# Altium PCB Modem.PcbDoc
Units mm, origin at the board's own origin, x right, y up, seen from the top; angles counter-clockwise.
Board outline 131.95 x 85.6 mm, 2 copper layers (Top Layer, Bottom Layer); 20 components, 17 nets, 99 pads, 0 vias.
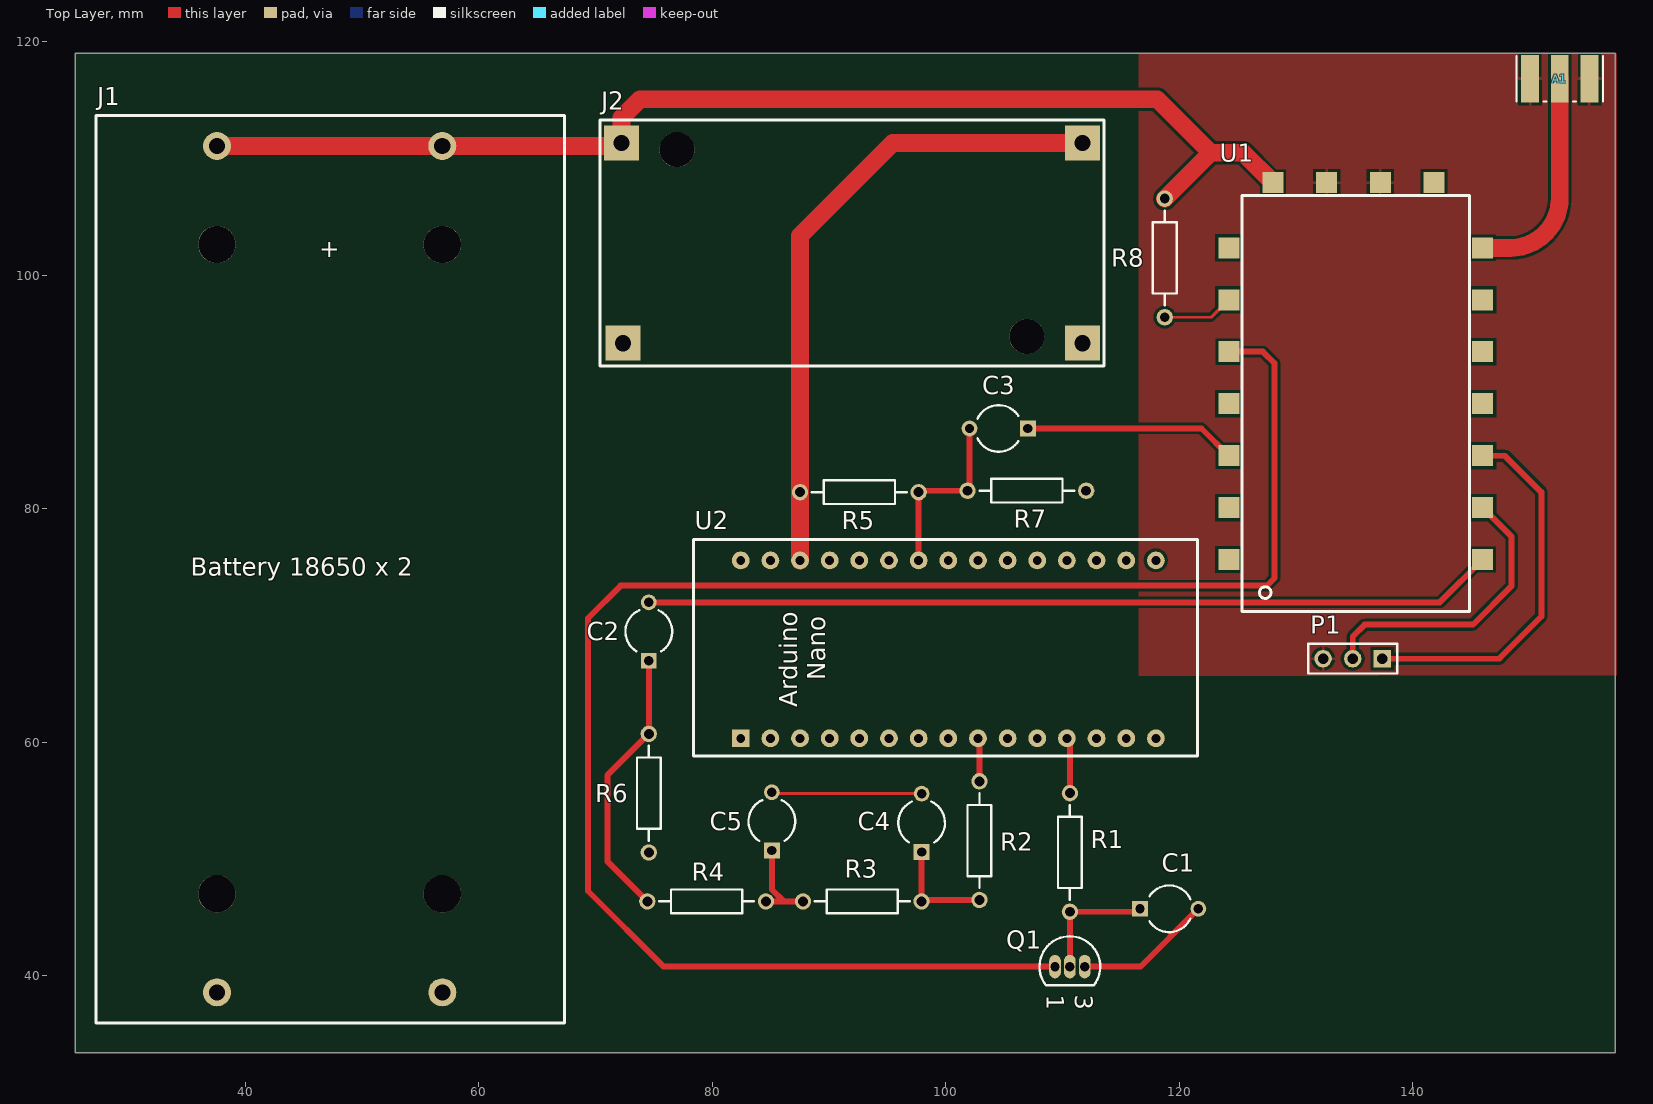
[diagram p0: Top Layer view]
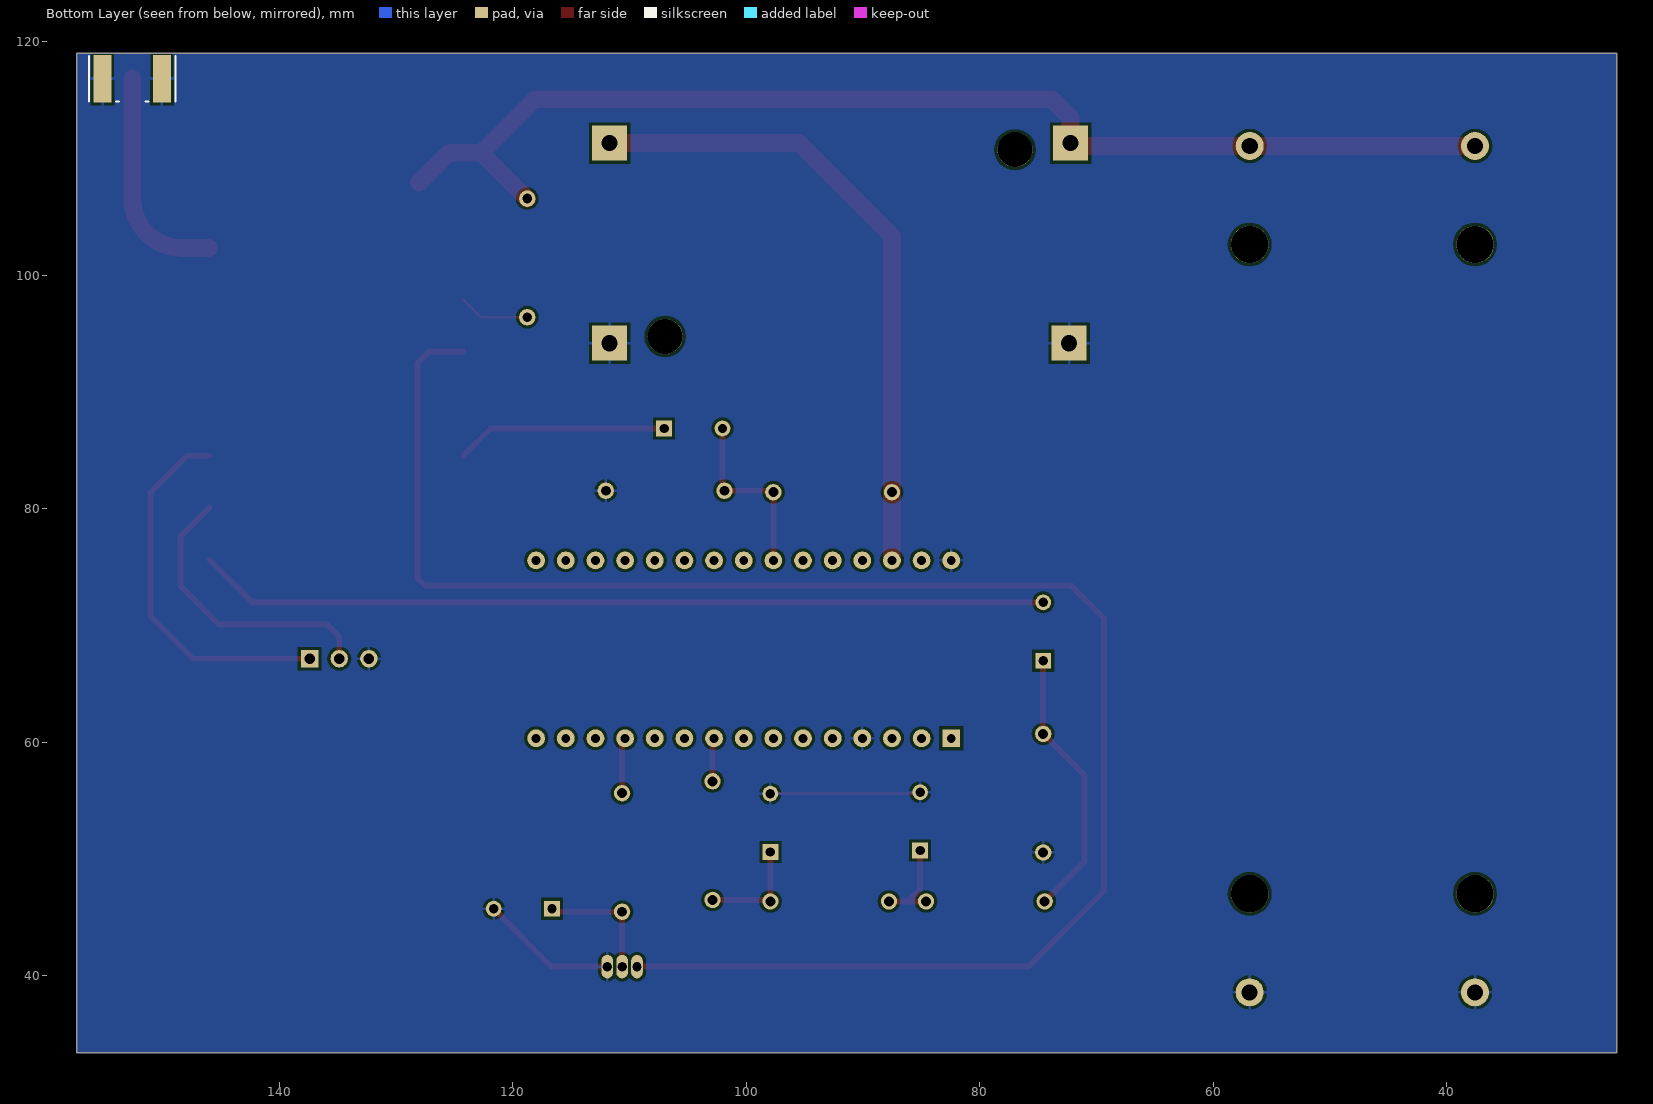
[diagram p1: Bottom Layer view, seen from below]

## Layer stack, top to bottom
Top Solder: solder mask 0.0102, Solder Resist, Dk 3.5
Top Layer: signal copper 0.0356
Dielectric 1: dielectric 0.32, FR-4, Dk 4.8
Bottom Layer: signal copper 0.0356
Bottom Solder: solder mask 0.0102, Solder Resist, Dk 3.5

## Board outline
25.4,33.401 157.353,33.401 157.353,72.517 157.353,118.999 25.4,118.999

## Design rules (kind name [scope] priority, off if disabled: settings)
Clearance [All] p1: gap=0.254
PolygonConnect [All] p1: connectstyle=Relief reliefconductorwidth=0.254 reliefentries=4 polygonreliefangle="90 Angle" airgapwidth=0.254
RoutingVias [All] p1: holewidth=0.711 width=1.27 viastyle="Through Hole" minholewidth=0.711 minwidth=1.27 maxholewidth=0.711 maxwidth=1.27
SolderMaskExpansion [All] p1: expansion=0.102
Width [All] p1: maxlimit=1.524 minlimit=0.254 preferedwidth=0.762
30 further rules are at their usual default settings.

## Components (designator, comment, footprint, x,y, rotation, side; value= is the part's Value field where it differs from the comment)
A1 "Basic Antenna" CON-SMA-EDGE062 152.578,116.84 r90 top
C1 "Cap2" CAPR5-4X5 119.126,45.72 r0 top
C2 "Cap2" CAPR5-4X5 74.549,69.469 r90 top
C3 "Cap2" CAPR5-4X5 104.521,86.868 r180 top
C4 "Cap2" CAPR5-4X5 97.917,53.086 r90 top
C5 "Cap2" CAPR5-4X5 85.09,53.213 r90 top
J1 "BatteryHolder18650" BatteryHolder18650 67.31,113.665 r270 top
J2 "CN6009" CN6009 70.358,113.284 r0 top
P1 "Header 3" HDR1X3 137.389,67.142 r180 top
Q1 "P2N2222A" 29-04 110.617,40.767 r270 top
R1 "Res2" AXIAL-0.4 110.617,50.546 r270 top
R2 "Res2" AXIAL-0.4 102.87,51.562 r270 top
R3 "Res2" AXIAL-0.4 92.837,46.355 r180 top
R4 "Res2" AXIAL-0.4 79.502,46.355 r180 top
R5 "Res2" AXIAL-0.4 92.583,81.407 r180 top
R6 "Res2" AXIAL-0.4 74.549,55.626 r90 top
R7 "Res2" AXIAL-0.4 106.934,81.534 r180 top
R8 "Res2" AXIAL-0.4 118.745,101.473 r270 top
U1 "SA818" SA818 125.349,106.807 r0 top
U2 "arduinoNano" "Arduino nano" 78.359,58.801 r0 top

## Footprints (in the part's own frame and the unit in brackets; to place one, negate y for a bottom-side part, rotate by r counter-clockwise, add the part's x,y. Pads: shape width x height; smd on the part's side, far side on the other; paste and mask are expansions set on the pad)
29-04 [mm] "TO, Flat Index; 3 In-Line, Axial Leads; Body Dia. 4.8mm; Leads 0.48 x 0.5 mm (max)"
  oval 2x1 hole 0.8: 1(0,-1.27) 2(0,0) 3(0,1.27)
  silkscreen extent -2.6,-2.6 1.6,2.6
"Arduino nano" [mil] "arduino nano"
  rect 60x60 hole 30: 1(160,60)
  round 60 hole 30: 2(260,60) 3(360,60) 4(460,60) 5(560,60) 6(660,60) 7(760,60) 8(860,60) 9(960,60) 10(1060,60) 11(1160,60) 12(1260,60) 13(1360,60) 14(1460,60) 15(1560,60) 16(1460,660) 17(1360,660) 18(1260,660) 19(1160,660) 20(1060,660) 21(960,660) 22(860,660) 23(760,660) 24(660,660) 25(560,660) 26(460,660) 27(360,660) 28(260,660) 29(160,660) 30(1560,660)
  silkscreen extent 0,0 1700,730
AXIAL-0.4 [mm] "Axial Device, Thru-Hole; 2 Leads; 0.4 in Pin Spacing"
  round 1.4 hole 0.85: 1(-5.08,0) 2(5.08,0)
  silkscreen extent -4.06,-1.02 4.06,1.02
BatteryHolder18650 [mm]
  round 2.4 hole 1.38: 1(2.6,-10.455) 2(75.1,-10.45) 3(2.6,-29.755) 4(75.1,-29.755)
  round 3.2 hole 3.2 unplated mask+1: ""(11.04,-10.455) ""(11.04,-29.755) ""(66.66,-29.755) ""(66.66,-10.455)
  silkscreen extent 0,-40.13 77.72,0
CAPR5-4X5 [mm] "Capacitor; 2 Leads"
  rect 1.35x1.35 hole 0.8: 1(-2.5,0)
  round 1.35 hole 0.8: 2(2.5,0)
  silkscreen extent -1.69,-2 1.82,2
CN6009 [mm]
  rect 3x3 hole 1.38: 1(1.841,-1.968) 2(1.968,-19.113) 3(41.338,-1.968) 4(41.338,-19.113)
  round 3 hole 3 mask+0.5: ""(6.604,-2.54) ""(36.576,-18.54)
  silkscreen extent 0,-21.08 43.18,0
CON-SMA-EDGE062 [mil] "Connector, SMA Female Edge Mount for 0.062\" Thick Board, 5-Lead, Body Dia. 7.9mm"
  rect 160x60 smd: G(0,100) G(0,-100) S(0,0)
  rect 160x60 smd far side: G(0,100) G(0,-100)
  silkscreen extent -77,-146 76,146, body extent -77,-163 387,163, height 187
HDR1X3 [mm] "Connector; Header; 3 Position"
  rect 1.5x1.5 hole 0.9: 1(0,0)
  round 1.5 hole 0.9: 2(2.54,0) 3(5.08,0)
  silkscreen extent -1.27,-1.27 6.35,1.27
SA818 [mm]
  rect 1.8x1.8 smd: 1(-1.12,-31.166) 2(-1.12,-26.721) 3(-1.12,-22.276) 4(-1.12,-17.805) 5(-1.12,-13.36) 6(-1.12,-8.915) 7(-1.12,-4.47) 8(2.667,1.12) 9(7.264,1.12) 10(11.862,1.12) 11(16.459,1.12) 12(20.627,-4.47) 13(20.627,-8.915) 14(20.627,-13.36) 15(20.627,-17.805) 16(20.627,-22.276) 17(20.627,-26.721) 18(20.627,-31.166)
  silkscreen extent 0,-35.61 19.51,0

## Part data
C1 C2 C3 C4 C5: "Capacitor"
P1: "Header, 3-Pin"
Q1: "Amplifier Transistor NPN Silicon"
R1 R2 R3 R4 R5 R6 R7 R8: "Resistor"

## Nets (pads, with @x,y where several pads share a name; then routed paths per layer and width w, separated by ;. In a path a pad name is that pad's centre, name@x,y a point inside that pad or via, vN(x,y) a via of type N, cw(c..) or ccw(c..) an arc to the next point about the centre after c; other vN are vias at no path point)
+5: J2.3 R5.2 U2.27 | length 55.3
  Top Layer w1.524: U2.27 R5.2 87.503,103.378 95.441,111.316 J2.3
GND: A1.G C1.2 C4.2 C5.2 J1.2 J1.4 J2.2 J2.4 P1.3 Q1.3 R6.1 R7.1 U1.9 U1.10 U2.4 U2.29 | length 25.1
  Top Layer w0.254: C5.2 C5.2@85.344,55.459 ; C5.2@85.344,55.586 C4.2 ; P1.3 P1.3@132.588,67.422
  Top Layer w0.508: Q1.3 116.673,40.767 C1.2
NetA1_S: A1.S U1.12 | length 19.3
  Top Layer w1.524: U1.12 148.336,102.337 ccw(c148.336,106.576) 152.576,106.576 152.576,116.84 A1.S
NetC1_1: C1.1 Q1.2 R1.2 | length 10.8
  Top Layer w0.508: Q1.2 R1.2 116.372,45.466 C1.1
NetC2_1: C2.1 R4.2 R6.2 | length 23.5
  Top Layer w0.508: R4.2 70.993,49.784 70.993,57.15 R6.2 C2.1
NetC2_2: C2.2 U1.18 | length 72.9
  Top Layer w0.508: C2.2 142.304,71.969 U1.18
NetC3_1: C3.1 U1.3 | length 18.2
  Top Layer w0.508: C3.1 121.892,86.868 U1.3
NetC3_2: C3.2 R5.1 R7.2 U2.23 | length 15.1
  Top Layer w0.508: U2.23 R5.1 ; R5.1@97.79,81.534 R7.2 ; R7.2@102.021,81.701 C3.2
NetC4_1: C4.1 R2.2 R3.1 | length 9.2
  Top Layer w0.508: C4.1 R3.1 98.044,46.482 R2.2
NetC5_1: C5.1 R3.2 R4.1 | length 8
  Top Layer w0.508: R4.1 86.106,46.355 ; C5.1 85.09,47.371 86.106,46.355 ; R3.2 86.106,46.355
NetP1_1: P1.1 U1.16 | length 32.1
  Top Layer w0.508: P1.1 147.422,67.142 ; U1.16 147.879,84.531 151.003,81.407 151.003,70.764 147.401,67.163
NetP1_2: P1.2 U1.17 | length 25.1
  Top Layer w0.508: P1.2 134.849,69.047 135.865,70.063 145.146,70.063 148.463,73.381 148.463,77.599 U1.17
NetQ1_1: Q1.1 U1.5 | length 149
  Top Layer w0.508: Q1.1 75.819,40.767 69.342,47.244 69.342,70.612 72.136,73.406 127.508,73.406 128.143,74.041 128.143,92.456 127.152,93.447 U1.5
NetR1_1: R1.1 U2.12 | length 4.4
  Top Layer w0.508: R1.1 U2.12@110.617,60.071
NetR2_1: R2.1 U2.9 | length 3.6
  Top Layer w0.508: R2.1 U2.9@102.87,60.198
NetR8_2: R8.2 U1.6 | length 6.1
  Top Layer w0.254: R8.2 122.73,96.393 U1.6
VCC: J1.1 J1.3 J2.1 R8.1 U1.8 | length 101.6
  Top Layer w1.524: J1.3 J1.1 J2.1@71.949,111.065 ; J2.1 72.2,113.474 73.787,115.062 118.11,115.062 122.682,110.49 ; R8.1 122.682,110.49 ; U1.8 125.453,110.49 122.682,110.49
pads on no net: J1. J2. U1.1 U1.2 U1.4 U1.7 U1.11 U1.13 U1.14 U1.15 U2.1 U2.2 U2.3 U2.5 U2.6 U2.7 U2.8 U2.10 U2.11 U2.13 U2.14 U2.15 U2.16 U2.17 U2.18 U2.19 U2.20 U2.21 U2.22 U2.24 U2.25 U2.26 U2.28 U2.30

## Polygon pours and split planes (outlines as drawn)
GND on Bottom Layer "GND" (solid, pour order 4): 157.353,33.401 157.353,118.999 25.4,118.999 25.4,33.401 157.226,33.401 157.353,33.401 157.353,33.528
GND on Top Layer "GND" (solid, pour order 6): 157.328,119.024 116.51,119.024 116.51,65.659 157.455,65.71 157.48,118.999 157.277,118.999

## Text inside footprints (layer, text, board x,y; h text height)
J1: Top Overlay "+" at 46.33,101.549 h1.52; Top Overlay "Battery 18650 x 2" at 35.306,74.244 h1.52
Q1: Top Overlay "1" at 108.638,38.346 h1.5 r270; Top Overlay "3" at 111.084,38.346 h1.5 r270
U2: Top Overlay "Nano" at 89.662,65.278 h1.52 r90; Top Overlay "Arduino" at 87.249,62.992 h1.52 r90